# Altium PCB QY-PLC-20200726.PcbDoc (part 1 of 5)
Units mm, origin at the board's own origin, x right, y up, seen from the top; angles counter-clockwise.
Board outline 190.88 x 117.47 mm, 2 copper layers (Top Layer, Bottom Layer); 405 components, 307 nets, 1341 pads, 251 vias.
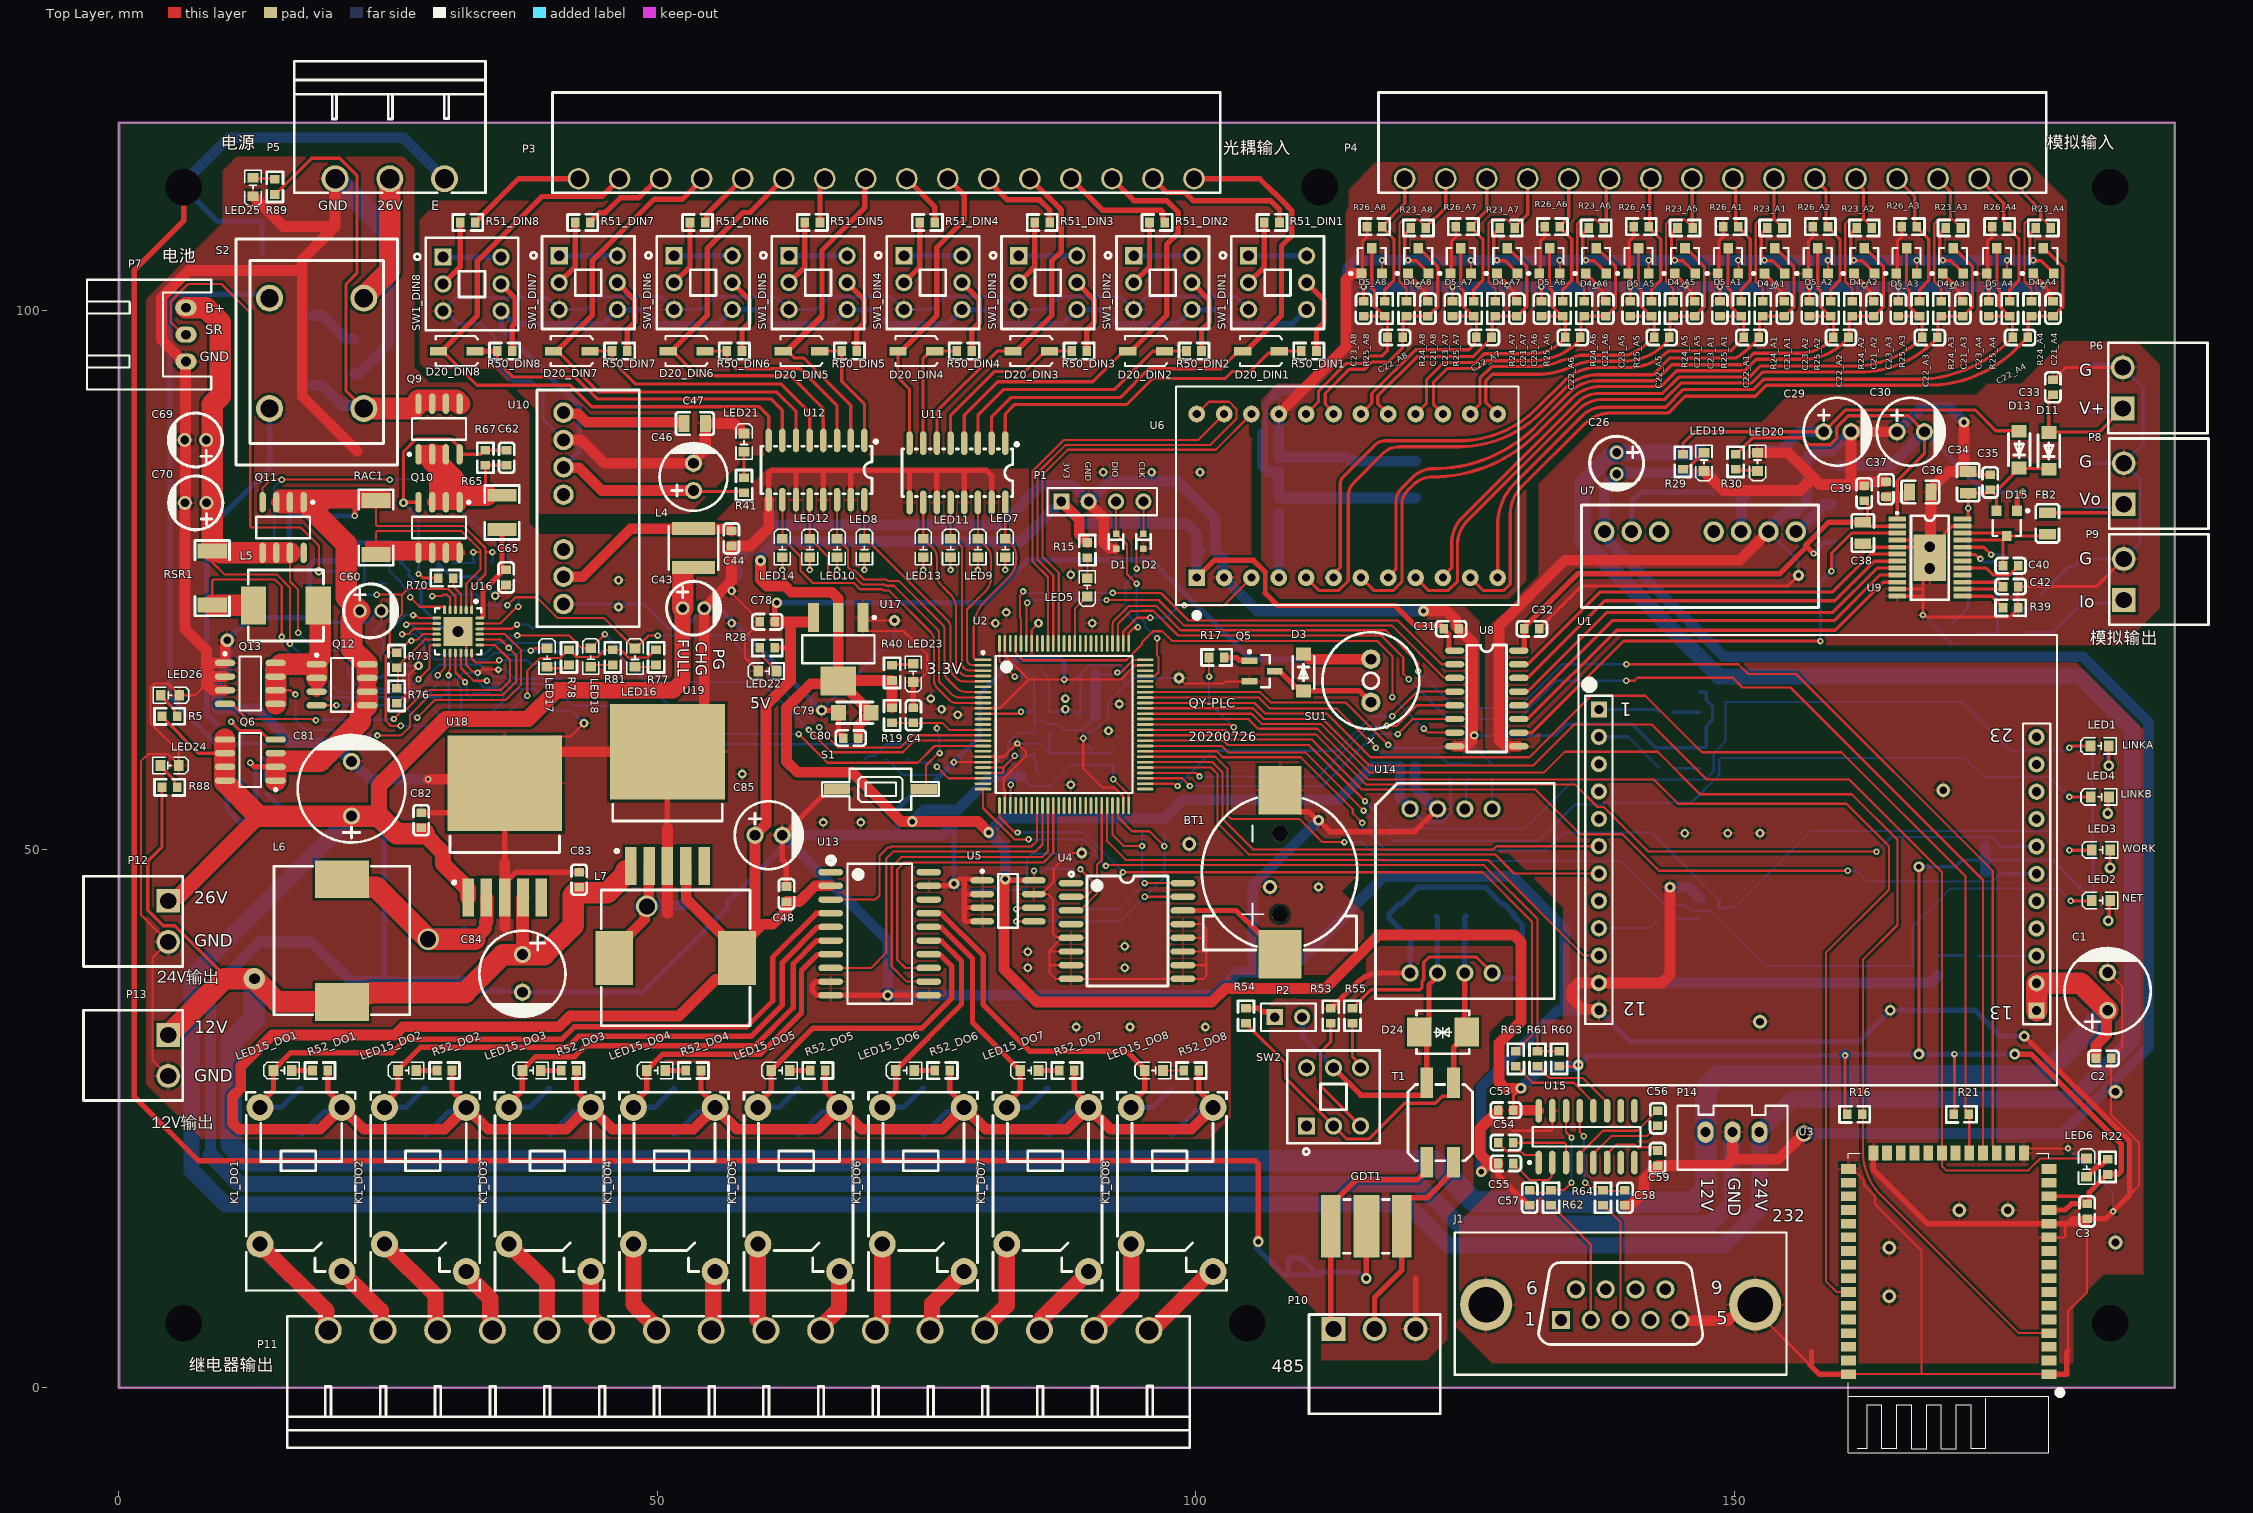
[diagram p0: Top Layer view]
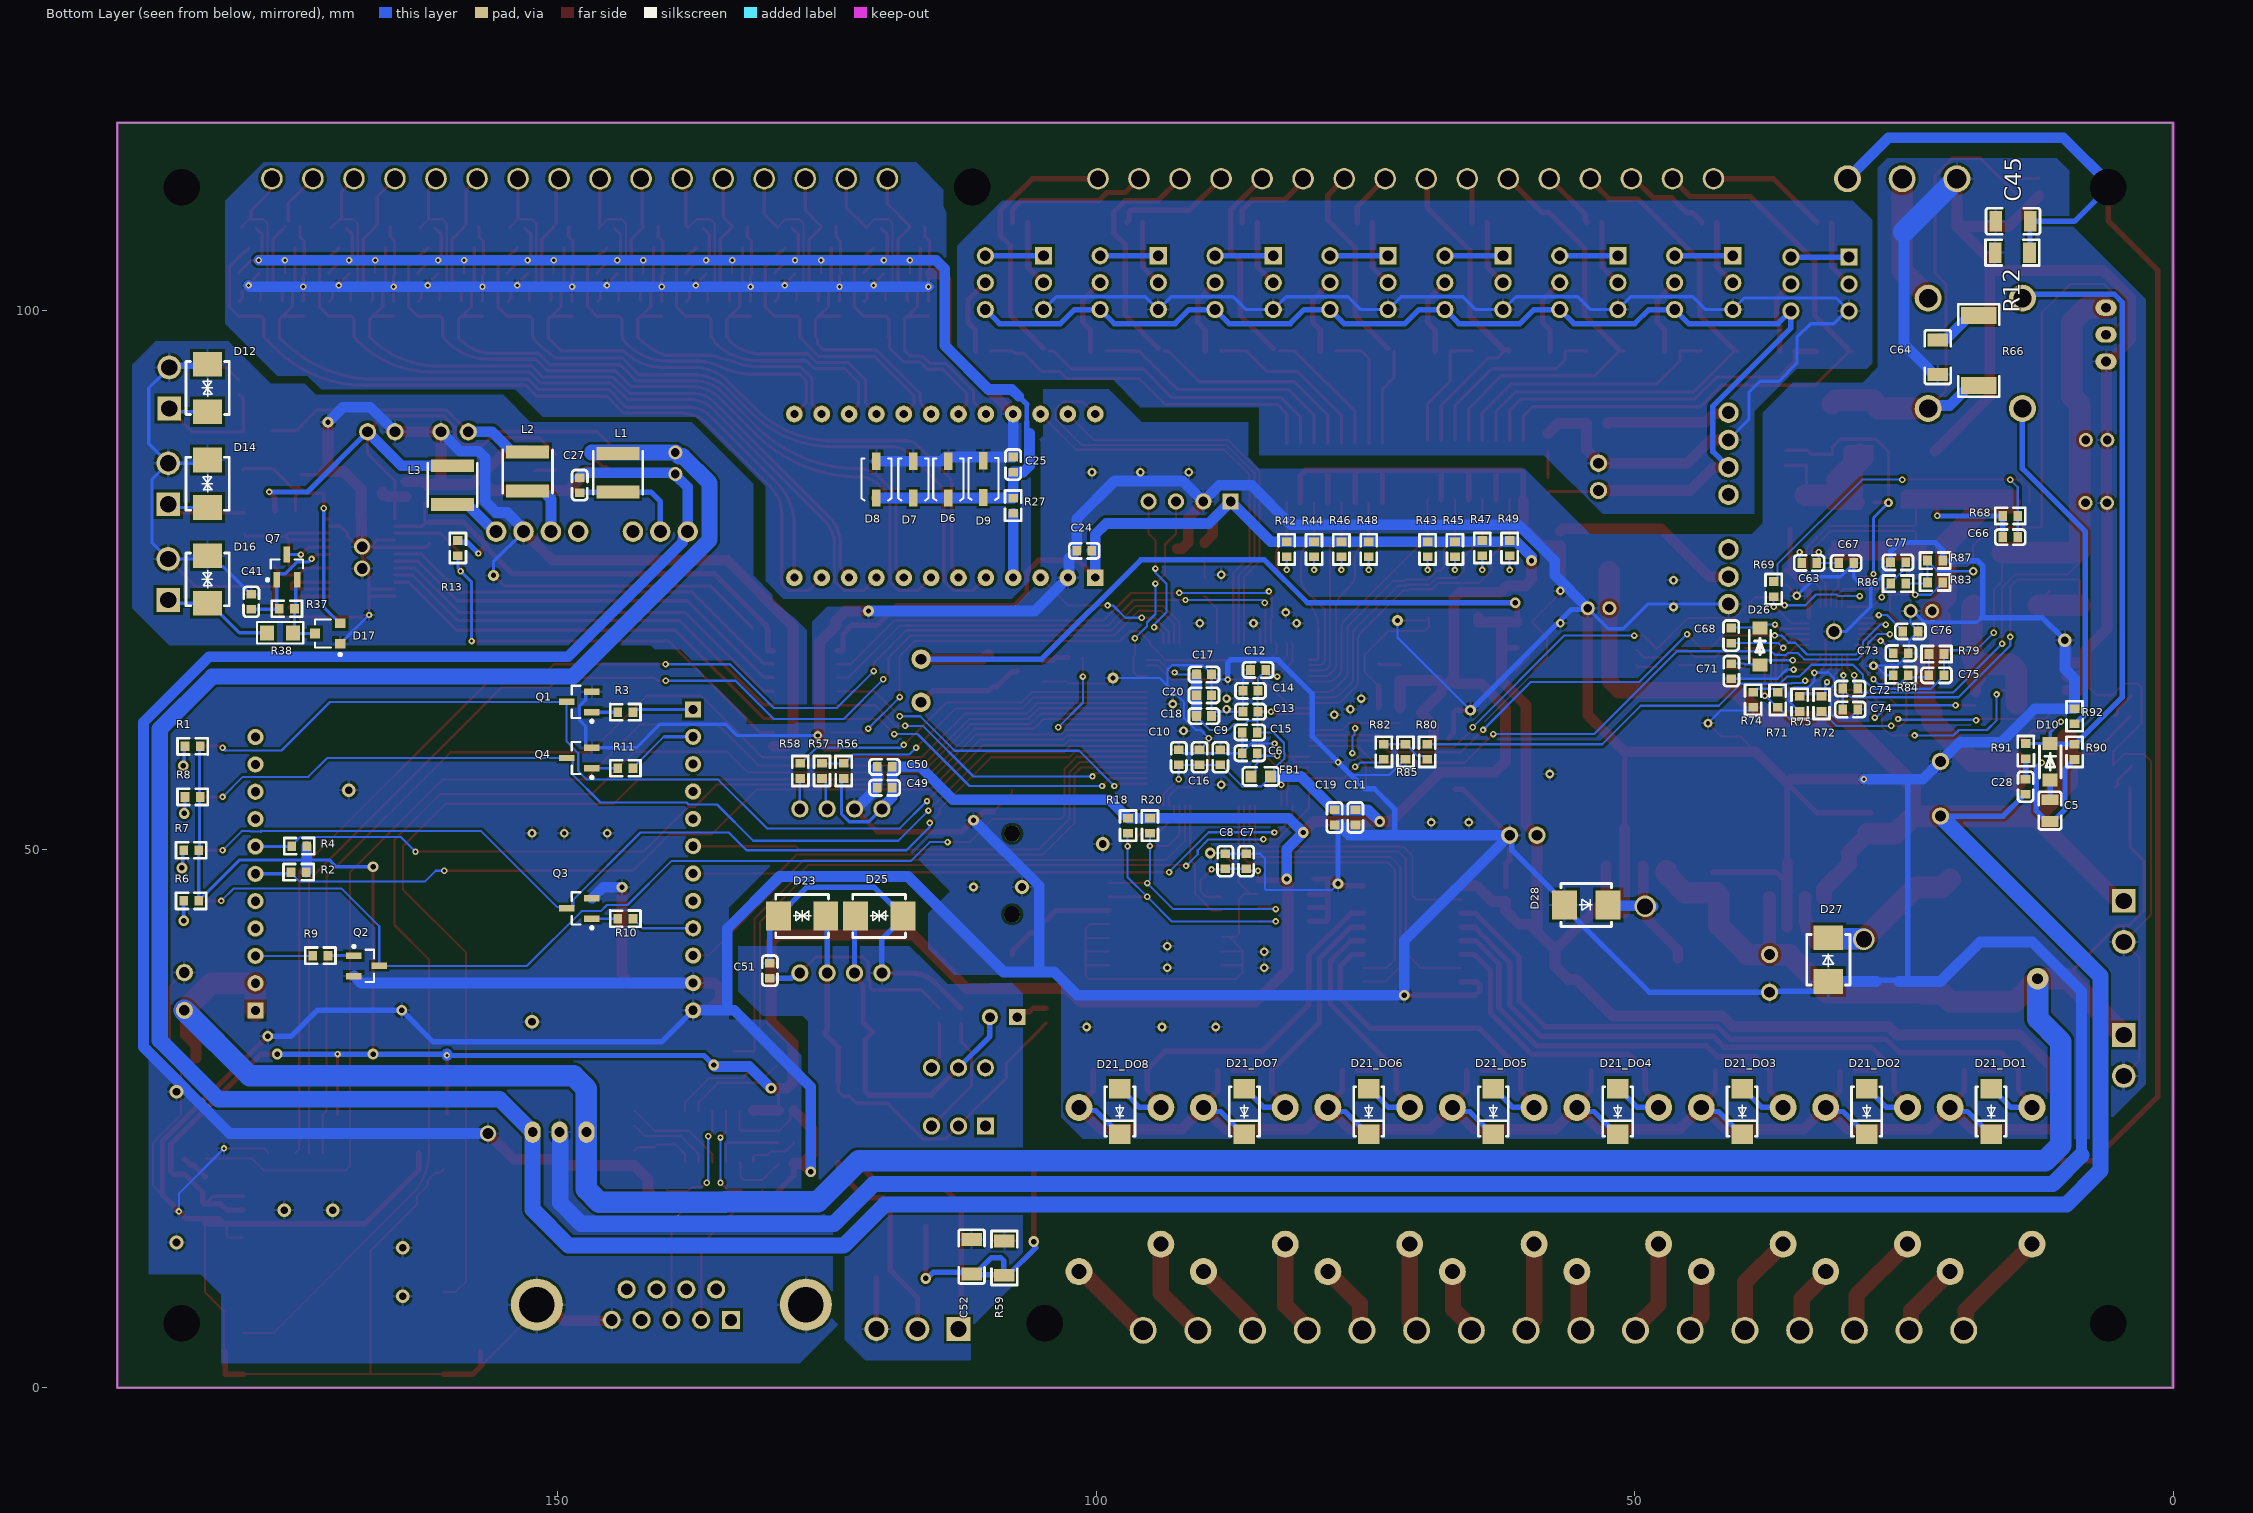
[diagram p1: Bottom Layer view, seen from below]

## Layer stack, top to bottom
Top Solder: solder mask 0.0102, Solder Resist, Dk 3.5
Top Layer: signal copper 0.0356
Dielectric 1: dielectric 0.32, FR-4, Dk 4.8
Bottom Layer: signal copper 0.0356
Bottom Solder: solder mask 0.0102, Solder Resist, Dk 3.5

## Board outline
0,0 0,117.475 190.881,117.475 190.881,0

## Design rules (kind name [scope] priority, off if disabled: settings)
Clearance Clearance_4 [InComponent('U16')] p1: gap=0.2 ignorepadtopadclearanceinfootprint=FALSE
Clearance Clearance_3 [InComponent('U16') vs IsPad] p2: gap=0.2 ignorepadtopadclearanceinfootprint=FALSE
Clearance Clearance_2 [InComponent('U9') vs IsPad] p3: gap=0.18 ignorepadtopadclearanceinfootprint=FALSE
Clearance Clearance_1 [InComponent('U2') or InComponent('U9') vs IsPad] p4: gap=0.2 ignorepadtopadclearanceinfootprint=FALSE
Clearance [All] p5: gap=0.254 ignorepadtopadclearanceinfootprint=FALSE except(0: Arc-Hole Track-Hole SMDPad-Hole THPad-Hole Via-Hole Fill-Hole Poly-Hole Region-Hole Text-Hole)
HoleSize [All] p1 off: absolutevalues=TRUE maxlimit=2.54 minlimit=0.025 maxpercent=80.000 minpercent=20.000
MinimumSolderMaskSliver [All] p1 off: minsoldermaskwidth=0.254
PolygonConnect [All] p1: connectstyle=Relief reliefconductorwidth=0.254 reliefentries=4 polygonreliefangle="90 Angle" airgapwidth=0.254
RoomDefinition U_adcIn [InComponentClass('U_adcIn')] p1 off: confinementstyle=ConfineIn formatcopy=TRUE lockcomponents=FALSE outline 131.826,70.88 131.826,93.486 96.774,93.486 96.774,70.88
RoomDefinition DO8 [InComponentClass('DO8')] p2 off: confinementstyle=ConfineIn formatcopy=TRUE lockcomponents=FALSE outline 103.632,8.382 103.632,30.734 92.202,30.734 92.202,8.382
RoomDefinition DO7 [InComponentClass('DO7')] p3 off: confinementstyle=ConfineIn formatcopy=TRUE lockcomponents=FALSE outline 92.075,8.382 92.075,30.734 80.645,30.734 80.645,8.382
RoomDefinition DO6 [InComponentClass('DO6')] p4 off: confinementstyle=ConfineIn formatcopy=TRUE lockcomponents=FALSE outline 80.518,8.382 80.518,30.734 69.088,30.734 69.088,8.382
RoomDefinition DO5 [InComponentClass('DO5')] p5 off: confinementstyle=ConfineIn formatcopy=TRUE lockcomponents=FALSE outline 68.961,8.382 68.961,30.734 57.531,30.734 57.531,8.382
RoomDefinition DO4 [InComponentClass('DO4')] p6 off: confinementstyle=ConfineIn formatcopy=TRUE lockcomponents=FALSE outline 57.404,8.382 57.404,30.734 45.974,30.734 45.974,8.382
RoomDefinition DO3 [InComponentClass('DO3')] p7 off: confinementstyle=ConfineIn formatcopy=TRUE lockcomponents=FALSE outline 45.847,8.382 45.847,30.734 34.417,30.734 34.417,8.382
RoomDefinition DO2 [InComponentClass('DO2')] p8 off: confinementstyle=ConfineIn formatcopy=TRUE lockcomponents=FALSE outline 34.29,8.382 34.29,30.734 22.86,30.734 22.86,8.382
RoomDefinition DO1 [InComponentClass('DO1')] p9 off: confinementstyle=ConfineIn formatcopy=TRUE lockcomponents=FALSE outline 22.733,8.382 22.733,30.734 11.303,30.734 11.303,8.382
RoomDefinition DIN8 [InComponentClass('DIN8')] p10 off: confinementstyle=ConfineIn formatcopy=TRUE lockcomponents=FALSE outline 38.227,95.123 38.227,109.22 27.575,109.22 27.575,95.123
RoomDefinition DIN7 [InComponentClass('DIN7')] p11 off: confinementstyle=ConfineIn formatcopy=TRUE lockcomponents=FALSE outline 48.895,95.123 48.895,109.093 38.243,109.093 38.243,95.123
RoomDefinition DIN6 [InComponentClass('DIN6')] p12 off: confinementstyle=ConfineIn formatcopy=TRUE lockcomponents=FALSE outline 59.563,95.123 59.563,109.093 48.911,109.093 48.911,95.123
RoomDefinition DIN5 [InComponentClass('DIN5')] p13 off: confinementstyle=ConfineIn formatcopy=TRUE lockcomponents=FALSE outline 70.231,95.123 70.231,109.093 59.579,109.093 59.579,95.123
RoomDefinition DIN4 [InComponentClass('DIN4')] p14 off: confinementstyle=ConfineIn formatcopy=TRUE lockcomponents=FALSE outline 80.899,95.123 80.899,109.093 70.247,109.093 70.247,95.123
RoomDefinition DIN3 [InComponentClass('DIN3')] p15 off: confinementstyle=ConfineIn formatcopy=TRUE lockcomponents=FALSE outline 91.567,95.123 91.567,109.093 80.915,109.093 80.915,95.123
RoomDefinition DIN2 [InComponentClass('DIN2')] p16 off: confinementstyle=ConfineIn formatcopy=TRUE lockcomponents=FALSE outline 102.235,95.123 102.235,109.093 91.583,109.093 91.583,95.123
RoomDefinition DIN1 [InComponentClass('DIN1')] p17 off: confinementstyle=ConfineIn formatcopy=TRUE lockcomponents=FALSE outline 112.903,95.123 112.903,109.093 102.251,109.093 102.251,95.123
RoutingVias [All] p1: holewidth=0.4 width=0.8 viastyle="Through Hole" minholewidth=0.3 minwidth=0.6 maxholewidth=5 maxwidth=5
SilkToSilkClearance [All] p1 off: silktosilkclearance=0.254
SilkToSolderMaskClearance [IsPad] p1 off: minsilkscreentomaskgap=0.254 clearancetoexposedcopper=TRUE
SolderMaskExpansion [All] p1: expansion=0.102 istentingtop=FALSE
Width [All] p1: maxlimit=5 minlimit=0.2 preferedwidth=0.254
26 further rules are at their usual default settings.

## Classes and differential pairs
component class U_power: C5 C28 C60 C62 C63 C64 C65 C66 C67 C68 C69 C70 C71 C72 C73 C74 C75 C76 C77 C78 C79 C80 C81 C82 C83 C84 C85 D10 D26 D27 D28 L5 L6 L7 LED16 LED17 LED18 LED22 LED23 LED24 LED25 LED26 Q6 Q9 Q10 Q11 Q12 Q13 R5 R28 R40 R65 R66 R67 R68 R69 R70 R71 R72 R73 R74 R75 R76 R77 R78 R79 R80 R81 R82 R83 R84 R85 R86 R87 R88 R89 R90 R91 R92 RAC1 RSR1 S2 U16 U17 U18 U19
component class TopView: C45 J1 P3 P4 P5 P6 P7 P8 P9 P10 P11 P12 P13 P14 R12
channel class subADCIn: A1 A2 A3 A4 A5 A6 A7 A8
component class A8: C21_A8 C22_A8 C23_A8 D4_A8 D5_A8 R23_A8 R24_A8 R25_A8 R26_A8
component class A7: C21_A7 C22_A7 C23_A7 D4_A7 D5_A7 R23_A7 R24_A7 R25_A7 R26_A7
component class A6: C21_A6 C22_A6 C23_A6 D4_A6 D5_A6 R23_A6 R24_A6 R25_A6 R26_A6
component class A5: C21_A5 C22_A5 C23_A5 D4_A5 D5_A5 R23_A5 R24_A5 R25_A5 R26_A5
component class A4: C21_A4 C22_A4 C23_A4 D4_A4 D5_A4 R23_A4 R24_A4 R25_A4 R26_A4
component class A3: C21_A3 C22_A3 C23_A3 D4_A3 D5_A3 R23_A3 R24_A3 R25_A3 R26_A3
component class A2: C21_A2 C22_A2 C23_A2 D4_A2 D5_A2 R23_A2 R24_A2 R25_A2 R26_A2
component class A1: C21_A1 C22_A1 C23_A1 D4_A1 D5_A1 R23_A1 R24_A1 R25_A1 R26_A1
component class U_relayOut: C48 U13
component class subDACOut: C33 C34 C35 C36 C37 C38 C39 C40 C41 C42 D11 D12 D13 D14 D15 D16 D17 FB2 Q7 R13 R37 R38 R39 U9
channel class subRelayOut: DO1 DO2 DO3 DO4 DO5 DO6 DO7 DO8
channel class subDIn: DIN1 DIN2 DIN3 DIN4 DIN5 DIN6 DIN7 DIN8
net class Relay_CTR[1..8]: Relay_CTR1 Relay_CTR2 Relay_CTR3 Relay_CTR4 Relay_CTR5 Relay_CTR6 Relay_CTR7 Relay_CTR8
net class OP_P[1..8]: OP_P1 OP_P2 OP_P3 OP_P4 OP_P5 OP_P6 OP_P7 OP_P8
net class OP_N[1..8]: DI_N1 DI_N2 DI_N3 DI_N4 DI_N5 DI_N6 DI_N7 DI_N8
net class DO_P[1..8]: DO_P1 DO_P2 DO_P3 DO_P4 DO_P5 DO_P6 DO_P7 DO_P8
net class DO_N[1..8]: DO_N1 DO_N2 DO_N3 DO_N4 DO_N5 DO_N6 DO_N7 DO_N8
net class DI_P[1..8]: DI_P1 DI_P2 DI_P3 DI_P4 DI_P5 DI_P6 DI_P7 DI_P8
net class DI_N[1..8]: DI_N1 DI_N2 DI_N3 DI_N4 DI_N5 DI_N6 DI_N7 DI_N8
net class CH_L_C[1..8]: CH_L_C1 CH_L_C2 CH_L_C3 CH_L_C4 CH_L_C5 CH_L_C6 CH_L_C7 CH_L_C8
net class CH_L[1..8]: CH_L1 CH_L2 CH_L3 CH_L4 CH_L5 CH_L6 CH_L7 CH_L8
net class CH_H_C[1..8]: CH_H_C1 CH_H_C2 CH_H_C3 CH_H_C4 CH_H_C5 CH_H_C6 CH_H_C7 CH_H_C8
net class CH_H[1..8]: CH_H1 CH_H2 CH_H3 CH_H4 CH_H5 CH_H6 CH_H7 CH_H8
component class U_mcu: BT1 C1 C2 C3 C4 C6 C7 C8 C9 C10 C11 C12 C13 C14 C15 C16 C17 C18 C19 C20 D1 D2 D3 FB1 LED1 LED2 LED3 LED4 LED5 LED6 P1 Q1 Q2 Q3 Q4 Q5 R1 R2 R3 R4 R6 R7 R8 R9 R10 R11 R15 R16 R17 R18 R19 R20 R21 R22 S1 SU1 U1 U2 U3 U4 U5
component class U_link: C49 C50 C51 C52 C53 C54 C55 C56 C57 C58 C59 D23 D24 D25 GDT1 P2 R53 R54 R55 R56 R57 R58 R59 R60 R61 R62 R63 R64 SW2 T1 U14 U15
component class U_dIn: C43 C44 C46 C47 L4 LED7 LED8 LED9 LED10 LED11 LED12 LED13 LED14 LED21 R41 R42 R43 R44 R45 R46 R47 R48 R49 U10 U11 U12
component class U_dacOut: C26 C27 C29 C30 C31 C32 L1 L2 L3 LED19 LED20 R29 R30 U7 U8
component class U_adcIn: C24 C25 D6 D7 D8 D9 R27 U6
component class DO8: D21_DO8 K1_DO8 LED15_DO8 R52_DO8
component class DO7: D21_DO7 K1_DO7 LED15_DO7 R52_DO7
component class DO6: D21_DO6 K1_DO6 LED15_DO6 R52_DO6
component class DO5: D21_DO5 K1_DO5 LED15_DO5 R52_DO5
component class DO4: D21_DO4 K1_DO4 LED15_DO4 R52_DO4
component class DO3: D21_DO3 K1_DO3 LED15_DO3 R52_DO3
component class DO2: D21_DO2 K1_DO2 LED15_DO2 R52_DO2
component class DO1: D21_DO1 K1_DO1 LED15_DO1 R52_DO1
component class DIN8: D20_DIN8 R50_DIN8 R51_DIN8 SW1_DIN8
component class DIN7: D20_DIN7 R50_DIN7 R51_DIN7 SW1_DIN7
component class DIN6: D20_DIN6 R50_DIN6 R51_DIN6 SW1_DIN6
component class DIN5: D20_DIN5 R50_DIN5 R51_DIN5 SW1_DIN5
component class DIN4: D20_DIN4 R50_DIN4 R51_DIN4 SW1_DIN4
component class DIN3: D20_DIN3 R50_DIN3 R51_DIN3 SW1_DIN3
component class DIN2: D20_DIN2 R50_DIN2 R51_DIN2 SW1_DIN2
component class DIN1: D20_DIN1 R50_DIN1 R51_DIN1 SW1_DIN1

## Components (designator, comment, footprint, x,y, rotation, side; value= is the part's Value field where it differs from the comment)
BT1 "CR1220-2" BAT-SMD_CR1220-2 107.796,47.879 r90 top
C1 "220uF,25V" CAP-TH_BD8.0-P3.50-D1.0-FD 184.658,36.802 r90 top value=KF221M025F115A
C2 "0.1uF,25V" C0603 184.277,30.607 r180 top value="104, 16V"
C3 "0.1uF,10V" C0603 182.753,16.383 r90 top value="104, 16V"
C4 "0.1uF,10V" C0603 73.754,62.445 r270 top value="104, 16V"
C5 "2.2uF,50V" C0805 11.43,53.594 r270 bottom value="0.1uF, 50V, 10%, X7R"
C6 "0.1uF,10V" C0603 85.725,58.928 r0 bottom
C7 "0.1uF,10V" C0603 86.059,48.895 r90 bottom value="104, 16V"
C8 "0.1uF,10V" C0603 88.011,48.895 r270 bottom value="104, 16V"
C9 "10uF,10V" C0603 88.462,58.547 r270 bottom value="104, 16V"
C10 "0.1uF,10V" C0603 92.329,58.547 r270 bottom value="104, 16V"
C11 "10uF,10V" C0603 75.917,52.959 r90 bottom value="104, 16V"
C12 "0.1uF,10V" C0603 84.959,66.645 r180 bottom value="104, 16V"
C13 "10uF,10V" C0603 85.66,62.778 r180 bottom value="104, 16V"
C14 "0.1uF,10V" C0603 85.66,64.711 r180 bottom value="104, 16V"
C15 "10uF,10V" C0603 85.725,60.844 r180 bottom value="104, 16V"
C16 "0.1uF,10V" C0603 90.395,58.547 r270 bottom value="104, 16V"
C17 "10uF,10V" C0603 89.978,66.245 r0 bottom value="104, 16V"
C18 "0.1uF,10V" C0603 89.978,62.377 r0 bottom value="104, 16V"
C19 "10uF,10V" C0603 77.851,52.959 r90 bottom value="104, 16V"
C20 "0.1uF,10V" C0603 89.978,64.311 r0 bottom value="104, 16V"
C21_A1 "0.1uF,25V" C0603 154.624,100.203 r270 top (schematic designator C21)
C21_A2 "0.1uF,25V" C0603 162.941,100.203 r270 top (schematic designator C21)
C21_A3 "0.1uF,25V" C0603 171.196,100.203 r270 top (schematic designator C21)
C21_A4 "0.1uF,25V" C0603 179.578,100.203 r270 top (schematic designator C21)
C21_A5 "0.1uF,25V" C0603 146.304,100.203 r270 top (schematic designator C21)
C21_A6 "0.1uF,25V" C0603 138.049,100.203 r270 top (schematic designator C21)
C21_A7 "0.1uF,25V" C0603 129.794,100.203 r270 top (schematic designator C21)
C21_A8 "0.1uF,25V" C0603 121.539,100.203 r270 top (schematic designator C21)
C22_A1 "1uF,25V" C0603 151.576,97.536 r180 top (schematic designator C22)
C22_A2 "1uF,25V" C0603 159.893,97.536 r180 top (schematic designator C22)
C22_A3 "1uF,25V" C0603 168.148,97.536 r180 top (schematic designator C22)
C22_A4 "1uF,25V" C0603 176.53,97.536 r180 top (schematic designator C22)
C22_A5 "1uF,25V" C0603 143.256,97.536 r180 top (schematic designator C22)
C22_A6 "1uF,25V" C0603 135.001,97.536 r180 top (schematic designator C22)
C22_A7 "1uF,25V" C0603 126.746,97.536 r180 top (schematic designator C22)
C22_A8 "1uF,25V" C0603 118.491,97.536 r180 top (schematic designator C22)
C23_A1 "0.1uF,25V" C0603 148.655,100.203 r90 top (schematic designator C23)
C23_A2 "0.1uF,25V" C0603 156.972,100.203 r90 top (schematic designator C23)
C23_A3 "0.1uF,25V" C0603 165.227,100.203 r90 top (schematic designator C23)
C23_A4 "0.1uF,25V" C0603 173.609,100.203 r90 top (schematic designator C23)
C23_A5 "0.1uF,25V" C0603 140.335,100.203 r90 top (schematic designator C23)
C23_A6 "0.1uF,25V" C0603 132.08,100.203 r90 top (schematic designator C23)
C23_A7 "0.1uF,25V" C0603 123.825,100.203 r90 top (schematic designator C23)
C23_A8 "0.1uF,25V" C0603 115.57,100.203 r90 top (schematic designator C23)
C24 "10uF,10V" C0603 101.092,77.724 r0 bottom
C25 "10uF,10V" C0603 107.696,85.725 r90 bottom
C26 "10uF,50V" CAP-TH_BD5.0-P2.00-D0.8-FD 139.065,85.852 r270 top value=100UF
C27 "1uF,50V" C0603 147.955,83.82 r270 bottom value="104, 16V"
C28 "0.1uF,50V" C0603 13.7,55.815 r270 bottom value="0.1uF, 50V, 10%, X7R"
C29 "100uF,50V" CAP-TH_BD6.3-P2.50-D1.0-FD 159.563,88.773 r0 top value=100UF
C30 "100uF,50V" CAP-TH_BD6.3-P2.50-D1.0-FD 166.37,88.773 r0 top value=100UF
C31 "0.1uF,16V" C0603 123.698,70.485 r180 top value="104, 16V"
C32 "0.1uF,16V" C0603 131.191,70.485 r180 top value="104, 16V"
C33 "0.1uF,50V" C0603 179.578,92.902 r90 top
C34 "4.7uF,50V" C0805 171.704,84.074 r90 top
C35 "0.1uF,50V" C0603 173.754,84.074 r90 top
C36 "10uF,50V" C0805 167.259,83.185 r0 top
C37 "0.1uF,50V" C0603 164.084,83.439 r90 top
C38 "10uF,50V" C0805 161.925,79.375 r270 top
C39 "0.1uF,50V" C0603 162.052,83.058 r90 top
C40 "4nF,50V" C0603 175.641,76.327 r0 top
C41 "22nF,50V" C0603 178.435,72.984 r90 bottom
C42 "1nF,50V" C0603 175.641,74.393 r0 top
C43 "10uF,50V" CAP-TH_BD5.0-P2.00-D0.8-FD 53.34,72.39 r0 top value=100UF
C44 "1uF,50V" C0603 56.87,78.867 r90 top value="104, 16V"
C45 "1nF,2kV" C1206 14.859,108.318 r0 bottom value="104, 16V"
C46 "100uF,50V" CAP-TH_BD6.3-P2.50-D1.0-FD 53.34,84.582 r90 top value=100UF
C47 "10uF,25V" C0805 53.467,89.535 r180 top value="104, 16V"
C48 "0.1uF,16V" C0603 61.976,45.847 r270 top
C49 "10uF,10V" C0603 119.634,55.724 r0 bottom value="104, 16V"
C50 "0.1uF,10V" C0603 119.634,57.658 r0 bottom value="104, 16V"
C51 "0.1uF,10V" C0603 130.302,38.733 r270 bottom value="104, 16V"
C52 "1nF,2kV" C1206 111.557,12.177 r90 bottom value="104, 16V"
C53 "0.1uF,50V" C0603 128.778,25.781 r0 top value="104, 16V"
C54 "0.1uF,50V" C0603 128.778,22.762 r0 top value="104, 16V"
C55 "0.1uF,50V" C0603 128.778,20.828 r0 top value="104, 16V"
C56 "0.1uF,50V" C0603 142.875,25.019 r270 top value="104, 16V"
C57 "1nF,50V" C0603 130.989,17.653 r270 top value="104, 16V"
C58 "1nF,50V" C0603 139.827,17.653 r270 top value="104, 16V"
C59 "0.1uF,50V" C0603 142.875,21.336 r90 top value="104, 16V"
C60 "10uF,50V" CAP-TH_BD5.0-P2.00-D0.8-FD 23.368,72.136 r0 top value=ERM1HM100D11OT
C62 "0.1uF,50V" C0603 35.988,86.36 r270 top value="0.1uF, 50V, 10%, X7R"
C63 "0.1uF,50V" C0603 33.782,76.581 r180 bottom value=0.1uF
C64 "2.2uF,50V" C1206 21.844,95.707 r90 bottom value="2.2uF, 35V, 10%, X7R"
C65 "1uF,50V" C0603 35.941,75.249 r270 top value="1uF, 50V, 10%, X7R"
C66 "0.1uF,50V" C0603 15.113,78.994 r0 bottom value="0.1uF, 50V, 10%, X7R"
C67 "0.1uF,50V" C0603 30.353,76.581 r180 bottom value="0.1uF, 50V, 10%, X7R"
C68 "0.1uF,50V" C0603 41.021,69.85 r90 bottom value="0.1uF, 50V, 10%, X7R"
C69 "10uF,50V" CAP-TH_BD5.0-P2.00-D0.8-FD 7.096,88.011 r180 top value=ERM1HM100D11OT
C70 "10uF,50V" CAP-TH_BD5.0-P2.00-D0.8-FD 7.128,82.169 r180 top value=ERM1HM100D11OT
C71 "1uF,50V" C0603 41.021,66.545 r270 bottom value="1uF, 16V, 10%, X7R"
C72 "0.1uF,50V" C0603 29.972,64.926 r0 bottom value="0.1uF, 16V, 10%, X7R"
C73 "1uF,50V" C0603 25.273,68.199 r180 bottom value="1uF, 16V, 10%, X7R"
C74 "0.1uF,50V" C0603 29.972,62.992 r0 bottom value="0.1uF, 50V, 10%, X7R"
C75 "22pF,50V" C0603 21.971,66.167 r0 bottom value="22pF, 25V, 10%, X7R"
C76 "0.027uF,50V" C0603 24.384,70.231 r180 bottom value="0.027uF, 16V, 5%, X7R"
C77 "0.1uF,50V" C0603 25.533,76.656 r0 bottom value="0.1uF, 16V, 10%, X7R"
C78 "0.1uF,16V" C0603 60.198,71.12 r0 top value=104,16V
C79 "22uF,10V" CAP-SMD_L3.2-W1.6-R-RD 68.316,62.682 r0 top value=TAJA226K010RNJ
C80 "0.1uF,16V" C0603 67.945,60.325 r0 top value="104, 50V"
C81 "470uF,50V" CAP-TH_BD10.0-P5.00-D1.0-FD 21.59,55.626 r90 top value=LKME1401V471MF
C82 "1uF,50V" C0603 28.067,52.705 r90 top
C83 "1uF,25V" C0603 42.729,47.182 r90 top
C84 "180uF,35V" CAP-TH_BD8.0-P3.50-D1.0-FD 37.459,38.481 r270 top value=LKMD1401H181MF
C85 "330uF,16V" CAP-TH_BD6.3-P2.50-D1.0-FD 60.325,51.308 r0 top value=LKMC0901C181MF
D1 "ESD5Z3V3 3.3V" SOD-523 92.583,78.613 r90 top
D2 "ESD5Z3V3 3.3V" SOD-523 95.123,78.613 r90 top
D3 "1N4148W" SOD-123_L2.8-W1.8-LS3.7-RD 109.982,66.421 r270 top
D4_A1 "BAV199" SOT-23 153.735,104.648 r0 top (schematic designator D4)
D4_A2 "BAV199" SOT-23 162.052,104.648 r0 top (schematic designator D4)
D4_A3 "BAV199" SOT-23 170.307,104.648 r0 top (schematic designator D4)
D4_A4 "BAV199" SOT-23 178.689,104.648 r0 top (schematic designator D4)
D4_A5 "BAV199" SOT-23 145.415,104.648 r0 top (schematic designator D4)
D4_A6 "BAV199" SOT-23 137.16,104.648 r0 top (schematic designator D4)
D4_A7 "BAV199" SOT-23 128.905,104.648 r0 top (schematic designator D4)
D4_A8 "BAV199" SOT-23 120.65,104.648 r0 top (schematic designator D4)
D5_A1 "BAV199" SOT-23 149.417,104.648 r0 top (schematic designator D5)
D5_A2 "BAV199" SOT-23 157.734,104.648 r0 top (schematic designator D5)
D5_A3 "BAV199" SOT-23 165.989,104.648 r0 top (schematic designator D5)
D5_A4 "BAV199" SOT-23 174.371,104.648 r0 top (schematic designator D5)
D5_A5 "BAV199" SOT-23 141.097,104.648 r0 top (schematic designator D5)
D5_A6 "BAV199" SOT-23 132.842,104.648 r0 top (schematic designator D5)
D5_A7 "BAV199" SOT-23 124.587,104.648 r0 top (schematic designator D5)
D5_A8 "BAV199" SOT-23 116.332,104.648 r0 top (schematic designator D5)
D6 "BZT52C5V6" SOD-123 113.713,84.328 r270 bottom
D7 "BZT52C5V6" SOD-123 116.967,84.328 r270 bottom
D8 "BZT52C5V6" SOD-123 120.396,84.328 r270 bottom
D9 "BZT52C5V6" SOD-123 110.458,84.377 r270 bottom
D10 "1N5819HW-7-F" SOD-123_L2.8-W1.8-LS3.7-FD 11.407,58.127 r90 bottom
D11 "1N5819HW-7-F" SOD-123_L2.8-W1.8-LS3.7-FD 179.197,86.995 r270 top
D12 "SMBJ33CA" SMB_L4.6-W3.6-LS5.3-BI 182.499,92.837 r270 bottom
D13 "1N5819HW-7-F" SOD-123_L2.8-W1.8-LS3.7-FD 176.443,87.122 r270 top
D14 "SMBJ20CA" SMB_L4.6-W3.6-LS5.3-BI 182.499,83.947 r270 bottom
D15 "BAV199" SOT-23 175.282,80.264 r180 top
D16 "SMBJ20CA" SMB_L4.6-W3.6-LS5.3-BI 182.499,75.057 r270 bottom
D17 "BAV199" SOT-23 171.355,70.038 r90 bottom
D20_DIN1 "BZT52C6V8" SOD-123 106.045,96.266 r0 top (schematic designator D20)
D20_DIN2 "BZT52C6V8" SOD-123 95.377,96.266 r0 top (schematic designator D20)
D20_DIN3 "BZT52C6V8" SOD-123 84.709,96.266 r0 top (schematic designator D20)
D20_DIN4 "BZT52C6V8" SOD-123 74.041,96.266 r0 top (schematic designator D20)
D20_DIN5 "BZT52C6V8" SOD-123 63.373,96.266 r0 top (schematic designator D20)
D20_DIN6 "BZT52C6V8" SOD-123 52.705,96.266 r0 top (schematic designator D20)
D20_DIN7 "BZT52C6V8" SOD-123 42.037,96.266 r0 top (schematic designator D20)
D20_DIN8 "BZT52C6V8" SOD-123 31.369,96.266 r0 top (schematic designator D20)
D21_DO1 "SS14" SMA_L4.4-W2.8-LS5.4-RD 16.891,25.654 r90 bottom (schematic designator D21)
D21_DO2 "SS14" SMA_L4.4-W2.8-LS5.4-RD 28.448,25.654 r90 bottom (schematic designator D21)
D21_DO3 "SS14" SMA_L4.4-W2.8-LS5.4-RD 40.005,25.654 r90 bottom (schematic designator D21)
D21_DO4 "SS14" SMA_L4.4-W2.8-LS5.4-RD 51.562,25.654 r90 bottom (schematic designator D21)
D21_DO5 "SS14" SMA_L4.4-W2.8-LS5.4-RD 63.119,25.654 r90 bottom (schematic designator D21)
D21_DO6 "SS14" SMA_L4.4-W2.8-LS5.4-RD 74.676,25.654 r90 bottom (schematic designator D21)
D21_DO7 "SS14" SMA_L4.4-W2.8-LS5.4-RD 86.233,25.654 r90 bottom (schematic designator D21)
D21_DO8 "SS14" SMA_L4.4-W2.8-LS5.4-RD 97.79,25.654 r90 bottom (schematic designator D21)
D23 "SMBJ6.5CA" SMB_L4.6-W3.6-LS5.3-BI 127.295,43.815 r0 bottom
D24 "SMBJ12CA" SMB_L4.6-W3.6-LS5.3-BI 122.936,33.02 r0 top
D25 "SMBJ6.5CA" SMB_L4.6-W3.6-LS5.3-BI 120.138,43.815 r0 bottom
D26 "1N5819HW-7-F" SOD-123_L2.8-W1.8-LS3.7-FD 38.354,68.834 r90 bottom
D27 "1N5822" SMB_L4.6-W3.6-LS5.3-RD 32.004,39.751 r270 bottom
D28 "1N5822" SMB_L4.6-W3.6-LS5.3-RD 54.483,44.831 r0 bottom
FB1 "600R@100MHZ" L0603 84.709,56.769 r0 bottom value=BLM18BD601SN1D
FB2 "600R@100MHZ" L0805 179.07,80.264 r90 top value="3.3K, 10%"
GDT1 "3RL090M-5-S" DIO-DT-SMD_L7.2-W5.0 115.824,14.986 r180 top
J1 "DS1034-09FUNSi44" DSUB-TH_2-5747706-0 139.434,7.724 r180 top
K1_DO1 "JZC-32F/005-HS3(555)" RELAY-TH_JZC-32F-XXXHXX 16.891,18.415 r270 top (schematic designator K1)
K1_DO2 "JZC-32F/005-HS3(555)" RELAY-TH_JZC-32F-XXXHXX 28.448,18.415 r270 top (schematic designator K1)
K1_DO3 "JZC-32F/005-HS3(555)" RELAY-TH_JZC-32F-XXXHXX 40.005,18.415 r270 top (schematic designator K1)
K1_DO4 "JZC-32F/005-HS3(555)" RELAY-TH_JZC-32F-XXXHXX 51.562,18.415 r270 top (schematic designator K1)
K1_DO5 "JZC-32F/005-HS3(555)" RELAY-TH_JZC-32F-XXXHXX 63.119,18.415 r270 top (schematic designator K1)
K1_DO6 "JZC-32F/005-HS3(555)" RELAY-TH_JZC-32F-XXXHXX 74.676,18.415 r270 top (schematic designator K1)
K1_DO7 "JZC-32F/005-HS3(555)" RELAY-TH_JZC-32F-XXXHXX 86.233,18.415 r270 top (schematic designator K1)
K1_DO8 "JZC-32F/005-HS3(555)" RELAY-TH_JZC-32F-XXXHXX 97.79,18.415 r270 top (schematic designator K1)
L1 "SLS3D16S6R8NTT" IND-SMD_L4.0-W4.0_SLS3DXX 144.399,84.963 r270 bottom value=6.8uH
L2 "SLS3D16S6R8NTT" IND-SMD_L4.0-W4.0_SLS3DXX 152.781,85.09 r270 bottom value=6.8uH
L3 "SLS3D16S6R8NTT" IND-SMD_L4.0-W4.0_SLS3DXX 159.766,83.82 r270 bottom value=6.8uH
L4 "SLS3D16S6R8NTT" IND-SMD_L4.0-W4.0_SLS3DXX 53.34,77.978 r90 top value=6.8uH
L5 "6.8uH" IND-SMD_L7.3-W6.8 15.494,72.644 r180 top value=RLF7030T-6R8M2R8
L6 "68uH" IND-SMD_L13.7-W12.6_MS1360 20.701,41.529 r270 top value=MS1360-680M
L7 "47uH" IND-SMD_L13.7-W12.6_MS1360 51.689,39.922 r0 top value=MS1360-470M
LED1 "NCD0603R1" LED0603-RD 183.908,59.599 r0 top
LED2 "NCD0603R1" LED0603-RD 184.035,45.249 r0 top
LED3 "NCD0603R1" LED0603-RD 184.035,49.947 r0 top
LED4 "NCD0603R1" LED0603-RD 183.935,54.864 r0 top
LED5 "NCD0603R1" LED0603-RD 89.916,74.334 r90 top
LED6 "NCD0603R1" LED0603-RD 182.702,20.447 r270 top
LED7 "NCD0603R1" LED0603-RD 82.296,77.978 r270 top
LED8 "NCD0603R1" LED0603-RD 69.215,77.978 r270 top
LED9 "NCD0603R1" LED0603-RD 79.756,77.978 r270 top
LED10 "NCD0603R1" LED0603-RD 66.675,77.978 r270 top
LED11 "NCD0603R1" LED0603-RD 77.216,77.978 r270 top
LED12 "NCD0603R1" LED0603-RD 64.135,77.978 r270 top
LED13 "NCD0603R1" LED0603-RD 74.676,77.978 r270 top
LED14 "NCD0603R1" LED0603-RD 61.595,77.978 r270 top
LED15_DO1 "NCD0603R1" LED0603-RD 15.197,29.464 r0 top (schematic designator LED15)
LED15_DO2 "NCD0603R1" LED0603-RD 26.754,29.464 r0 top (schematic designator LED15)
LED15_DO3 "NCD0603R1" LED0603-RD 38.311,29.464 r0 top (schematic designator LED15)
LED15_DO4 "NCD0603R1" LED0603-RD 49.868,29.464 r0 top (schematic designator LED15)
LED15_DO5 "NCD0603R1" LED0603-RD 61.425,29.464 r0 top (schematic designator LED15)
LED15_DO6 "NCD0603R1" LED0603-RD 72.982,29.464 r0 top (schematic designator LED15)
LED15_DO7 "NCD0603R1" LED0603-RD 84.539,29.464 r0 top (schematic designator LED15)
LED15_DO8 "NCD0603R1" LED0603-RD 96.096,29.464 r0 top (schematic designator LED15)
LED16 "NCD0603R1" LED0603-RD 47.916,67.796 r270 top
LED17 "NCD0603R1" LED0603-RD 39.751,67.818 r270 top
LED18 "NCD0603R1" LED0603-RD 43.815,67.818 r270 top
LED19 "NCD0603R1" LED0603-RD 147.174,85.979 r90 top
LED20 "NCD0603R1" LED0603-RD 152.146,85.979 r90 top
LED21 "NCD0603R1" LED0603-RD 58.039,87.757 r270 top
LED22 "NCD0603R1" LED0603-RD 60.198,66.548 r0 top
LED23 "NCD0603R1" LED0603-RD 73.749,66.382 r90 top
LED24 "NCD0603R1" LED0603-RD 4.699,57.785 r180 top
LED25 "NCD0603R1" LED0603-RD 12.446,111.506 r90 top
LED26 "NCD0603R1" LED0603-RD 4.738,64.313 r180 top
P1 "排针-4P" HDR1X4 87.503,82.296 r0 top
P2 "排针2.54mm 2P" HDR1X2 107.315,34.417 r0 top
P3 "WJ15EDGRC-3.81-16P" CONN-TH_16P-P3.81_WJ15EDGRC-3.81-16P 71.247,112.268 r180 top
P4 "WJ15EDGRC-3.81-16P" CONN-TH_16P-P3.81_WJ15EDGRC-3.81-16P 147.955,112.268 r180 top
P5 "KF2EDGRC-5.08-3P" CONN-TH_3P-P5.08_KF2EDGRC-5.08-3P 25.146,112.268 r180 top
P6 "WJ15EDGRC-3.81-2P" CONN-TH_2P-P3.81_WJ15EDGRC-3.81-2P 186.055,92.837 r90 top
P7 "XH2.54-3P" XH2.54-3P;弯角; 6.223,97.79 r270 top
P8 "WJ15EDGRC-3.81-2P" CONN-TH_2P-P3.81_WJ15EDGRC-3.81-2P 186.155,83.947 r90 top
P9 "WJ15EDGRC-3.81-2P" CONN-TH_2P-P3.81_WJ15EDGRC-3.81-2P 186.155,75.056 r90 top
P10 "WJ15EDGRC-3.81-3P" CONN-TH_3P-P3.81_WJ15EDGRC-3.81-3P 116.586,5.461 r0 top
P11 "KF2EDGRC-5.08-16P" CONN-TH_16P-P5.08_KF2EDGRC-5.08-16P 57.531,5.334 r0 top
P12 "WJ15EDGRC-3.81-2P" CONN-TH_2P-P3.81_WJ15EDGRC-3.81-2P 4.572,43.307 r270 top
P13 "WJ15EDGRC-3.81-2P" CONN-TH_2P-P3.81_WJ15EDGRC-3.81-2P 4.572,30.861 r270 top
P14 "XH2.54-3P" XH2.54-3P-直角 149.82,23.749 r0 top
Q1 "S8050" SOT-23_NPN 147.987,63.688 r0 bottom
Q2 "S8050" SOT-23_NPN 167.735,39.182 r180 bottom
Q3 "S8050" SOT-23_NPN 147.987,44.511 r0 bottom
Q4 "S8050" SOT-23_NPN 147.987,58.481 r0 bottom
Q5 "S8050" SOT-23_NPN 106.151,66.548 r0 top
Q6 "TDM3407" SO8_L 12.192,58.293 r180 top
Q7 "MMBTA05" SOT-23_NPN 175.133,76.2 r90 bottom
Q9 "TDM3407" SO8_L 29.718,89.027 r90 top
Q10 "TDM3407" SO8_L 29.718,79.883 r270 top
Q11 "TDM3407" SO8_L 15.24,79.883 r270 top
Q12 "FDS8447" SO8_L 20.701,65.278 r0 top
Q13 "FDS8447" SO8_L 12.192,65.405 r0 top
R1 "5.1K,1%" R0603 183.896,59.563 r180 bottom value="5.1K, 1%"
R2 "5.1K,1%" R0603 174.052,47.879 r180 bottom value="5.1K, 1%"
R3 "1K,1%" R0603 143.699,62.738 r0 bottom value="5.1K, 1%"
R4 "5.1K,1%" R0603 173.987,50.292 r180 bottom value="5.1K, 1%"
R5 "10K,1%" R0603 4.699,62.357 r180 top value="101, 精度5%"
R6 "5.1K,1%" R0603 184.023,45.212 r180 bottom value="5.1K, 1%"
R7 "5.1K,1%" R0603 184.023,49.911 r180 bottom value="5.1K, 1%"
R8 "5.1K,1%" R0603 183.896,54.864 r180 bottom value="5.1K, 1%"
R9 "1K,1%" R0603 172.02,40.132 r180 bottom value="5.1K, 1%"
R10 "1K,1%" R0603 143.699,43.561 r0 bottom value="5.1K, 1%"
R11 "1K,1%" R0603 143.699,57.531 r0 bottom value="5.1K, 1%"
R12 "1M,1%" R1206 14.91,105.41 r180 bottom value="3.3K, 10%"
R13 "10K,1%" R0603 159.258,77.978 r270 bottom value="3.3K, 10%"
R15 "5.1K,1%" R0603 89.916,77.789 r90 top value="5.1K, 1%"
R16 "5.1K,1%" R0603 161.163,25.4 r180 top value="5.1K, 1%"
R17 "3.3K,1%" R0603 101.919,67.818 r180 top value="3.3K, 10%"
R18 "3.3K,1%" R0603 97.028,52.197 r270 bottom value=10K
R19 "10K,1%" R0603 71.787,62.445 r270 top value=10K
R20 "3.3K,1%" R0603 94.996,52.197 r270 bottom value=10K
R21 "5.1K,1%" R0603 171.069,25.4 r180 top value="5.1K, 1%"
R22 "5.1K,1%" R0603 184.658,20.512 r270 top value="5.1K, 1%"
R23_A1 "1M,1%" R0603 153.735,107.696 r180 top value="3.3K, 10%" (schematic designator R23)
R23_A2 "1M,1%" R0603 162.052,107.696 r180 top value="3.3K, 10%" (schematic designator R23)
R23_A3 "1M,1%" R0603 170.307,107.696 r180 top value="3.3K, 10%" (schematic designator R23)
R23_A4 "1M,1%" R0603 178.689,107.696 r180 top value="3.3K, 10%" (schematic designator R23)
R23_A5 "1M,1%" R0603 145.415,107.696 r180 top value="3.3K, 10%" (schematic designator R23)
R23_A6 "1M,1%" R0603 137.16,107.696 r180 top value="3.3K, 10%" (schematic designator R23)
R23_A7 "1M,1%" R0603 128.905,107.696 r180 top value="3.3K, 10%" (schematic designator R23)
R23_A8 "1M,1%" R0603 120.65,107.696 r180 top value="3.3K, 10%" (schematic designator R23)
R24_A1 "100R,1%" R0603 152.636,100.203 r90 top value="3.3K, 10%" (schematic designator R24)
R24_A2 "100R,1%" R0603 160.953,100.203 r90 top value="3.3K, 10%" (schematic designator R24)
R24_A3 "100R,1%" R0603 169.208,100.203 r90 top value="3.3K, 10%" (schematic designator R24)
R24_A4 "100R,1%" R0603 177.59,100.203 r90 top value="3.3K, 10%" (schematic designator R24)
R24_A5 "100R,1%" R0603 144.316,100.203 r90 top value="3.3K, 10%" (schematic designator R24)
R24_A6 "100R,1%" R0603 136.061,100.203 r90 top value="3.3K, 10%" (schematic designator R24)
R24_A7 "100R,1%" R0603 127.806,100.203 r90 top value="3.3K, 10%" (schematic designator R24)
R24_A8 "100R,1%" R0603 119.551,100.203 r90 top value="3.3K, 10%" (schematic designator R24)
R25_A1 "100R,1%" R0603 150.622,100.203 r90 top value="3.3K, 10%" (schematic designator R25)
R25_A2 "100R,1%" R0603 158.939,100.203 r90 top value="3.3K, 10%" (schematic designator R25)
R25_A3 "100R,1%" R0603 167.194,100.203 r90 top value="3.3K, 10%" (schematic designator R25)
R25_A4 "100R,1%" R0603 175.576,100.203 r90 top value="3.3K, 10%" (schematic designator R25)
R25_A5 "100R,1%" R0603 142.302,100.203 r90 top value="3.3K, 10%" (schematic designator R25)
R25_A6 "100R,1%" R0603 134.047,100.203 r90 top value="3.3K, 10%" (schematic designator R25)
R25_A7 "100R,1%" R0603 125.792,100.203 r90 top value="3.3K, 10%" (schematic designator R25)
R25_A8 "100R,1%" R0603 117.537,100.203 r90 top value="3.3K, 10%" (schematic designator R25)
R26_A1 "1M,1%" R0603 149.671,107.823 r180 top value="3.3K, 10%" (schematic designator R26)
R26_A2 "1M,1%" R0603 157.988,107.823 r180 top value="3.3K, 10%" (schematic designator R26)
R26_A3 "1M,1%" R0603 166.243,107.823 r180 top value="3.3K, 10%" (schematic designator R26)
R26_A4 "1M,1%" R0603 174.625,107.823 r180 top value="3.3K, 10%" (schematic designator R26)
R26_A5 "1M,1%" R0603 141.351,107.823 r180 top value="3.3K, 10%" (schematic designator R26)
R26_A6 "1M,1%" R0603 133.096,107.823 r180 top value="3.3K, 10%" (schematic designator R26)
R26_A7 "1M,1%" R0603 124.841,107.823 r180 top value="3.3K, 10%" (schematic designator R26)
R26_A8 "1M,1%" R0603 116.586,107.823 r180 top value="3.3K, 10%" (schematic designator R26)
R27 "51R,1%" R0603 107.696,81.915 r90 bottom value="3.3K, 10%"
R28 "10K,1%" R0603 60.198,68.707 r0 top value="101, 精度5%"
R29 "3K,1%" R0603 145.217,85.979 r90 top value="3.3K, 10%"
R30 "3K,1%" R0603 150.114,85.979 r90 top value="3.3K, 10%"
R37 "1K,1%" R0603 175.133,72.335 r180 bottom value="3.3K, 10%"
R38 "10R,1%" R0805 175.768,70.104 r0 bottom value="3.3K, 10%"
R39 "15K,1%" R0603 175.641,72.426 r0 top value="3.3K, 10%"
R40 "3.3K,1%" R0603 71.787,66.382 r270 top value="101, 精度5%"
R41 "3K,1%" R0603 58.039,83.82 r270 top value="3.3K, 10%"
R42 "10K,1%" R0603 82.296,77.851 r90 bottom value="5.1K, 1%"
R43 "10K,1%" R0603 69.215,77.851 r90 bottom value="5.1K, 1%"
R44 "10K,1%" R0603 79.756,77.851 r90 bottom value="5.1K, 1%"
R45 "10K,1%" R0603 66.675,77.851 r90 bottom value="5.1K, 1%"
R46 "10K,1%" R0603 77.216,77.851 r90 bottom value="5.1K, 1%"
R47 "10K,1%" R0603 64.135,77.978 r90 bottom value="5.1K, 1%"
R48 "10K,1%" R0603 74.676,77.851 r90 bottom value="5.1K, 1%"
R49 "10K,1%" R0603 61.595,77.978 r90 bottom value="5.1K, 1%"
R50_DIN1 "1K,1%" R0603 110.49,96.266 r180 top value="5.1K, 1%" (schematic designator R50)
R50_DIN2 "1K,1%" R0603 99.822,96.266 r180 top value="5.1K, 1%" (schematic designator R50)
R50_DIN3 "1K,1%" R0603 89.154,96.266 r180 top value="5.1K, 1%" (schematic designator R50)
R50_DIN4 "1K,1%" R0603 78.486,96.266 r180 top value="5.1K, 1%" (schematic designator R50)
R50_DIN5 "1K,1%" R0603 67.818,96.266 r180 top value="5.1K, 1%" (schematic designator R50)
R50_DIN6 "1K,1%" R0603 57.15,96.266 r180 top value="5.1K, 1%" (schematic designator R50)
R50_DIN7 "1K,1%" R0603 46.482,96.266 r180 top value="5.1K, 1%" (schematic designator R50)
R50_DIN8 "1K,1%" R0603 35.814,96.266 r180 top value="5.1K, 1%" (schematic designator R50)
R51_DIN1 "1K,1%" R0603 107.061,108.204 r0 top value="5.1K, 1%" (schematic designator R51)
R51_DIN2 "1K,1%" R0603 96.393,108.204 r0 top value="5.1K, 1%" (schematic designator R51)
R51_DIN3 "1K,1%" R0603 85.725,108.204 r0 top value="5.1K, 1%" (schematic designator R51)
R51_DIN4 "1K,1%" R0603 75.057,108.204 r0 top value="5.1K, 1%" (schematic designator R51)
R51_DIN5 "1K,1%" R0603 64.389,108.204 r0 top value="5.1K, 1%" (schematic designator R51)
R51_DIN6 "1K,1%" R0603 53.721,108.204 r0 top value="5.1K, 1%" (schematic designator R51)
R51_DIN7 "1K,1%" R0603 43.053,108.204 r0 top value="5.1K, 1%" (schematic designator R51)
R51_DIN8 "1K,1%" R0603 32.385,108.204 r0 top value="5.1K, 1%" (schematic designator R51)
R52_DO1 "5.1K,1%" R0603 18.669,29.464 r180 top value="5.1K, 1%" (schematic designator R52)
R52_DO2 "5.1K,1%" R0603 30.226,29.464 r180 top value="5.1K, 1%" (schematic designator R52)
R52_DO3 "5.1K,1%" R0603 41.783,29.464 r180 top value="5.1K, 1%" (schematic designator R52)
R52_DO4 "5.1K,1%" R0603 53.34,29.464 r180 top value="5.1K, 1%" (schematic designator R52)
R52_DO5 "5.1K,1%" R0603 64.897,29.464 r180 top value="5.1K, 1%" (schematic designator R52)
R52_DO6 "5.1K,1%" R0603 76.454,29.464 r180 top value="5.1K, 1%" (schematic designator R52)
R52_DO7 "5.1K,1%" R0603 88.011,29.464 r180 top value="5.1K, 1%" (schematic designator R52)
R52_DO8 "5.1K,1%" R0603 99.568,29.464 r180 top value="5.1K, 1%" (schematic designator R52)
R53 "470R,1%" R0603 112.522,34.544 r90 top value="3.3K, 10%"
R54 "120R,1%" R0603 104.648,34.544 r270 top value="3.3K, 10%"
R55 "470R,1%" R0603 114.535,34.544 r90 top value="3.3K, 10%"
R56 "10K,1%" R0603 123.437,57.277 r270 bottom value="3.3K, 10%"
R57 "22R,1%" R0603 125.451,57.277 r270 bottom value="3.3K, 10%"
R58 "22R,1%" R0603 127.464,57.277 r270 bottom value="3.3K, 10%"
R59 "1M,1%" R1206 108.509,12.05 r270 bottom value="3.3K, 10%"
R60 "10K,1%" R0603 133.726,30.545 r270 top value="3.3K, 10%"
R61 "22R,1%" R0603 131.713,30.545 r270 top value="3.3K, 10%"
R62 "22R,1%" R0603 132.969,17.653 r270 top value="3.3K, 10%"
R63 "22R,1%" R0603 129.699,30.545 r270 top value="3.3K, 10%"
R64 "22R,1%" R0603 137.795,17.653 r270 top value="3.3K, 10%"
R65 "10R,1%" R1210 35.56,81.28 r270 top value="10欧, 精度5%"
R66 "2R,1%" R2512 18.034,96.318 r270 bottom value=2
R67 "100K,1%" R0603 34.021,86.36 r270 top value="100K, 精度5%"
R68 "100K,1%" R0603 15.113,80.956 r180 bottom value="100K, 精度5%"
R69 "1K,1%" R0603 37.084,74.168 r270 bottom value="1K, 精度5%"
R70 "1K,1%" R0603 30.353,75.184 r180 top value="1K, 精度5%"
R71 "100K,1%" R0603 36.703,63.881 r90 bottom value="100K, 精度0.5%"
R72 "100K,1%" R0603 32.639,63.5 r90 bottom value=100K
R73 "100K,1%" R0603 25.781,67.564 r270 top value=100K
R74 "39K,1%" R0603 38.989,63.881 r270 bottom value="39K, 精度0.5%"
R75 "10K,1%" R0603 34.671,63.5 r270 bottom value="10K, 精度0.5%"
R76 "5K,1%" R0603 25.781,64.254 r270 top value="19.1K, 精度0.5%"
R77 "3.3K,1%" R0603 49.872,67.818 r270 top value="10K, 精度5%"
R78 "3.3K,1%" R0603 41.783,67.818 r270 top value=10K
R79 "510K,1%" R0603 21.963,68.129 r180 bottom value="684, 精度0.5%"
R80 "500K,1%" R0603 69.252,59.055 r90 bottom value="684, 精度0.5%"
R81 "3.3K,1%" R0603 45.847,67.818 r270 top value=10K
R82 "1K,1%" R0603 73.279,59.055 r90 bottom value="1K, 精度5%"
R83 "9.1K,1%" R0603 22.098,74.778 r0 bottom value="912, 精度1%"
R84 "47K,1%" R0603 25.277,66.167 r180 bottom value="01D, 精度0.5%"
R85 "10K,1%" R0603 71.266,59.055 r90 bottom value="01D, 精度0.5%"
R86 "100R,1%" R0603 25.527,74.676 r0 bottom value="101, 精度5%"
R87 "430K,1%" R0603 22.098,76.811 r180 bottom value="434, 精度1%"
R88 "10K,1%" R0603 4.699,55.753 r180 top value="101, 精度5%"
R89 "10K,1%" R0603 14.478,111.506 r270 top value="101, 精度5%"
R90 "100K,1%" R0603 9.144,59.047 r90 bottom value="100K, 精度5%"
R91 "100R,1%" R0603 13.666,59.123 r90 bottom value="100K, 精度5%"
R92 "100K,1%" R0603 9.144,62.357 r90 bottom value="100K, 精度5%"
RAC1 "0.01R,1%" R2010 23.876,79.883 r90 top value=CR2010FR010E04Z
RSR1 "0.01R,1%" R2010 8.659,75.184 r90 top value=CR2010FR010E04Z
S1 "轻触开关, 3*6*2.5MM" 3*6*2.5MM 67.818,57.531 r0 top
S2 "SDDJE33300" SW-TH_SDDJE33300 18.358,96.182 r90 top
SU1 "YS-MBZ9042C05R42" BUZ-TH_BD9.0-P4.00-D1.0-FD 116.244,65.659 r90 top value=HY-5525
SW1_DIN1 "XKB8585-1-Z-140" SW-TH_6P-L8.6-W8.6-P2.50-LS5.4 107.585,102.616 r270 top (schematic designator SW1)
SW1_DIN2 "XKB8585-1-Z-140" SW-TH_6P-L8.6-W8.6-P2.50-LS5.4 96.917,102.616 r270 top (schematic designator SW1)
SW1_DIN3 "XKB8585-1-Z-140" SW-TH_6P-L8.6-W8.6-P2.50-LS5.4 86.249,102.616 r270 top (schematic designator SW1)
SW1_DIN4 "XKB8585-1-Z-140" SW-TH_6P-L8.6-W8.6-P2.50-LS5.4 75.581,102.616 r270 top (schematic designator SW1)
SW1_DIN5 "XKB8585-1-Z-140" SW-TH_6P-L8.6-W8.6-P2.50-LS5.4 64.913,102.616 r270 top (schematic designator SW1)
SW1_DIN6 "XKB8585-1-Z-140" SW-TH_6P-L8.6-W8.6-P2.50-LS5.4 54.245,102.616 r270 top (schematic designator SW1)
SW1_DIN7 "XKB8585-1-Z-140" SW-TH_6P-L8.6-W8.6-P2.50-LS5.4 43.577,102.616 r270 top (schematic designator SW1)
SW1_DIN8 "XKB8585-1-Z-140" SW-TH_6P-L8.6-W8.6-P2.50-LS5.4 32.782,102.489 r270 top (schematic designator SW1)
SW2 "XKB8585-1-Z-140" SW-TH_6P-L8.6-W8.6-P2.50-LS5.4 112.776,27.018 r0 top
T1 "B82793S0513N201" FILTER-SMD_4P-L9.0-W6.0_B82790 122.682,24.638 r270 top
U1 "USR-LTE-7S4 V2" USR-LTE-7S4 158.496,49.149 r180 top locked
U2 "STM32F103VC" LQFP100_L 87.757,61.595 r0 top
U3 "WH-BLE102-V1.1" WH-BLE102-V1.1 179.197,21.79 r180 top
U4 "DS3231SN#" SOIC-16_L10.3-W7.5-P1.27-LS10.3-BL 93.599,42.418 r270 top
U5 "MB85RC16PNF" 8S1_N 82.55,45.212 r0 top
U6 "TPS08U_Sketch" TPS08U 114.046,82.824 r0 top
U7 "WRA2415S-3WR2" PWRM-TH_WRA2415S-3WR2 146.812,79.502 r0 top
U8 "π162M31" SOIC-16_L9.9-W3.9-P1.27-LS6.0-BL 127,64.008 r270 top
U9 "AD5422BREZ" TSSOP-24_L7.8-W4.4-P0.65-LS6.4-BL-EP 168.148,77.089 r270 top
U10 "KW3-24S12E" PWRM-TH_WRA2415S-3WR2 41.275,81.661 r90 top
U11 "TLP291-4GB" SOP-16_L10.3-W4.4-P1.27-LS7.0-BL 77.851,84.963 r180 top
U12 "TLP291-4GB" SOP-16_L10.3-W4.4-P1.27-LS7.0-BL 64.77,85.217 r180 top
U13 "TPIC6B595-SOP" TPIC6B595 70.634,42.164 r180 top
U14 "RSM3485PHT" COMM-TH_RSM3485PHT 123.698,46.137 r270 top
U15 "MAX3232CSE" NSO16_N 136.271,23.318 r90 top
U16 "BQ24610" QFN-24_L4.0-W4.0-P0.50-TL-EP2.7 31.496,70.231 r270 top
U17 "AMS1117-3.3V" ams1117/SOT223 69.088,71.528 r270 top
U18 "XL2596T-12E1" TO-263-5_L10.6-W9.6-P1.70-LS15.9-TL 35.814,50.834 r90 top
U19 "XL2596T-5.0E1" TO-263-5_L10.6-W9.6-P1.70-LS15.9-TL 50.927,53.755 r90 top

## Footprints (in the part's own frame and the unit in brackets; to place one, negate y for a bottom-side part, rotate by r counter-clockwise, add the part's x,y. Pads: shape width x height; smd on the part's side, far side on the other; paste and mask are expansions set on the pad)
3*6*2.5MM [mm]
  rect 2.45x1 smd: 1(-1.15,-1.95) 2(6.925,-1.95)
  silkscreen extent -2.53,-3.85 8.3,-0.05
8S1_N [mm] "8-Pin Small Outline Integrated Circuit 1.27 mm Pitch, IPC Medium Density"
  oval 2.2x0.6 smd: 1(-2.4,1.905) 2(-2.4,0.635) 3(-2.4,-0.635) 4(-2.4,-1.905) 5(2.4,-1.905) 6(2.4,-0.635) 7(2.4,0.635) 8(2.4,1.905)
  silkscreen extent -2.52,-2.5 0.9,2.88, body extent -1.95,-2.45 1.95,2.45, height 1.73
ams1117/SOT223 [mm]
  rect 2.7x1 smd: 1(0,0) 2(0,-2.3) 3(0,-4.6)
  rect 2.7x3.3 smd: 2(5.9,-2.3)
  silkscreen extent -0.12,-5.65 4.25,1.18, body extent 1.6,-5.7 4.2,1, height 1.3
BAT-SMD_CR1220-2 [mm]
  rect 4.5x4 smd: 1(-7.62,0) 2(7.62,0)
  round 1.5 hole 1.5 unplated: ""(-3.912,0) ""(3.581,0)
  silkscreen extent -7.22,-7.19 6.92,7.25
BUZ-TH_BD9.0-P4.00-D1.0-FD [mm]
  round 1.8 hole 1: 1(-2,0) 2(2,0)
  silkscreen extent -4.5,-4.5 4.5,4.5
C0603 [mm]
  rect 0.8x0.9 smd: 1(-0.7,0) 2(0.7,0)
  silkscreen extent -1.4,-0.7 1.4,0.72
C0805 [mm]
  rect 1x1.55 smd: 1(-1,0) 2(1,0)
  silkscreen extent -1.75,-1.04 1.75,1.04
C1206 [mm]
  rect 1.2x1.9 smd: 1(-1.6,0) 2(1.6,0)
  silkscreen extent -2.5,-1.2 2.5,1.2
CAP-SMD_L3.2-W1.6-R-RD [mm]
  rect 1.4x1.4 smd: 1(1.5,0) 2(-1.5,0)
  silkscreen extent -1.7,-1 1.7,1
CAP-TH_BD5.0-P2.00-D0.8-FD [mm]
  round 1.3 hole 0.8: 1(-1,0) 2(1,0)
  silkscreen extent -2.5,-2.5 2.5,2.5
CAP-TH_BD6.3-P2.50-D1.0-FD [mm]
  round 1.6 hole 1: 1(-1.27,0) 2(1.27,0)
  silkscreen extent -3.15,-3.15 3.17,3.15
CAP-TH_BD8.0-P3.50-D1.0-FD [mm]
  round 1.6 hole 1: 1(-1.75,0) 2(1.75,0)
  silkscreen extent -3.96,-4 4.04,4
CAP-TH_BD10.0-P5.00-D1.0-FD [mm]
  round 1.6 hole 1: 1(-2.54,0) 2(2.54,0)
  silkscreen extent -5,-5 5.08,4.99
COMM-TH_RSM3485PHT [mm]
  round 1.6 hole 1: 1(-7.62,-3.81) 2(-7.62,-1.27) 3(-7.62,1.27) 4(-7.62,3.81) 7(7.62,3.81) 8(7.62,1.27) 9(7.62,-1.27) 10(7.62,-3.81)
  silkscreen extent -10,-7.03 10,9.57
CONN-TH_2P-P3.81_WJ15EDGRC-3.81-2P [mm]
  rect 2.2x2.2 hole 1.5: 1(-1.905,0)
  round 2.2 hole 1.5: 2(1.905,0)
  silkscreen extent -4.19,-7.88 4.19,1.35
CONN-TH_3P-P3.81_WJ15EDGRC-3.81-3P [mm]
  rect 2.2x2.2 hole 1.5: 1(-3.81,0)
  round 2.2 hole 1.5: 2(0,0) 3(3.81,0)
  silkscreen extent -6.1,-7.88 6.1,1.35
CONN-TH_3P-P5.08_KF2EDGRC-5.08-3P [mm]
  round 2.5 hole 1.8: 1(-5.08,0) 2(0,0) 3(5.08,0)
  silkscreen extent -8.88,-10.9 8.88,1.3
CONN-TH_16P-P3.81_WJ15EDGRC-3.81-16P [mm]
  round 2 hole 1.5: 1(-28.575,0) 2(-24.765,0) 3(-20.955,0) 4(-17.145,0) 5(-13.335,0) 6(-9.525,0) 7(-5.715,0) 8(-1.905,0) 9(1.905,0) 10(5.715,0) 11(9.525,0) 12(13.335,0) 13(17.145,0) 14(20.955,0) 15(24.765,0) 16(28.575,0)
  silkscreen extent -31,-8 31,1.3
CONN-TH_16P-P5.08_KF2EDGRC-5.08-16P [mm]
  round 2.5 hole 1.8: 1(-38.1,0) 2(-33.02,0) 3(-27.94,0) 4(-22.86,0) 5(-17.78,0) 6(-12.7,0) 7(-7.62,0) 8(-2.54,0) 9(2.54,0) 10(7.62,0) 11(12.7,0) 12(17.78,0) 13(22.86,0) 14(27.94,0) 15(33.02,0) 16(38.1,0)
  silkscreen extent -41.9,-10.9 41.9,1.3
DIO-DT-SMD_L7.2-W5.0 [mm]
  rect 1.8x5.8 smd: 1(-3.3,0) 3(3.3,0)
  rect 2.4x5.8 smd: 2(0,0)
  silkscreen extent -2.13,-2.51 2.11,2.49
DSUB-TH_2-5747706-0 [mm]
  rect 1.69x1.69 hole 1.09: 1(5.54,1.42)
  round 1.69 hole 1.09: 2(2.77,1.42) 3(0,1.42) 4(-2.77,1.42) 5(-5.54,1.42) 6(4.155,-1.42) 7(1.385,-1.42) 8(-1.385,-1.42) 9(-4.155,-1.42)
  round 4.826 hole 3.302: 10(12.495,0) 11(-12.495,0)
  silkscreen extent -15.4,-6.7 15.4,6.51
FILTER-SMD_4P-L9.0-W6.0_B82790 [mm]
  rect 2.85x1.2 smd: 1(-3.7,1.25) 2(3.7,1.25) 3(3.7,-1.25) 4(-3.7,-1.25)
  silkscreen extent -3.53,-3 3.56,3
HDR1X2 [mm] "Connector; Header; 2 Position"
  rect 1.5x1.5 hole 0.9: 1(0,0)
  round 1.5 hole 0.9: 2(2.54,0)
  silkscreen extent -1.27,-1.27 3.81,1.27
HDR1X4 [mm] "Connector; Header; 4 Position"
  rect 1.5x1.5 hole 0.9: 1(0,0)
  round 1.5 hole 0.9: 2(2.54,0) 3(5.08,0) 4(7.62,0)
  silkscreen extent -1.27,-1.27 8.89,1.27
IND-SMD_L4.0-W4.0_SLS3DXX [mm]
  rect 1.2x4 smd: 1(-1.8,0) 2(1.8,0)
  silkscreen extent -2,-2.3 2,2.3
IND-SMD_L7.3-W6.8 [mm]
  rect 2.35x3.5 smd: 1(-3,0) 2(3,0)
  silkscreen extent -3.5,-3.3 3.5,3.3
IND-SMD_L13.7-W12.6_MS1360 [mm]
  rect 3.5x5 smd: 1(-5.7,0) 2(5.7,0)
  silkscreen extent -6.9,-6.3 6.9,6.3
L0603 [mm]
  rect 1x1.1 smd: 1(-0.9,0) 2(0.9,0)
  silkscreen extent -1.68,-0.85 1.68,0.85
L0805 [mm]
  rect 1x1.55 smd: 1(-1,0) 2(1,0)
  silkscreen extent -1.78,-1.08 1.78,1.08
LED0603-RD [mm]
  rect 0.9x1 smd: 1(-0.85,0) 2(0.85,0)
  silkscreen extent -1.75,-0.75 1.55,0.75
LQFP100_L [mm] "Thin QFP, 100-Leads, Body 14x14mm, Pitch 0.5mm, IPC High Density"
  oval 1.55x0.25 smd: 1(-7.525,6) 2(-7.525,5.5) 3(-7.525,5) 4(-7.525,4.5) 5(-7.525,4) 6(-7.525,3.5) 7(-7.525,3) 8(-7.525,2.5) 9(-7.525,2) 10(-7.525,1.5) 11(-7.525,1) 12(-7.525,0.5) 13(-7.525,0) 14(-7.525,-0.5) 15(-7.525,-1) 16(-7.525,-1.5) 17(-7.525,-2) 18(-7.525,-2.5) 19(-7.525,-3) 20(-7.525,-3.5) 21(-7.525,-4) 22(-7.525,-4.5) 23(-7.525,-5) 24(-7.525,-5.5) 25(-7.525,-6) 51(7.525,-6) 52(7.525,-5.5) 53(7.525,-5) 54(7.525,-4.5) 55(7.525,-4) 56(7.525,-3.5) 57(7.525,-3) 58(7.525,-2.5) 59(7.525,-2) 60(7.525,-1.5) 61(7.525,-1) 62(7.525,-0.5) 63(7.525,0) 64(7.525,0.5) 65(7.525,1) 66(7.525,1.5) 67(7.525,2) 68(7.525,2.5) 69(7.525,3) 70(7.525,3.5) 71(7.525,4) 72(7.525,4.5) 73(7.525,5) 74(7.525,5.5) 75(7.525,6)
  oval 0.25x1.55 smd: 26(-6,-7.525) 27(-5.5,-7.525) 28(-5,-7.525) 29(-4.5,-7.525) 30(-4,-7.525) 31(-3.5,-7.525) 32(-3,-7.525) 33(-2.5,-7.525) 34(-2,-7.525) 35(-1.5,-7.525) 36(-1,-7.525) 37(-0.5,-7.525) 38(0,-7.525) 39(0.5,-7.525) 40(1,-7.525) 41(1.5,-7.525) 42(2,-7.525) 43(2.5,-7.525) 44(3,-7.525) 45(3.5,-7.525) 46(4,-7.525) 47(4.5,-7.525) 48(5,-7.525) 49(5.5,-7.525) 50(6,-7.525) 76(6,7.525) 77(5.5,7.525) 78(5,7.525) 79(4.5,7.525) 80(4,7.525) 81(3.5,7.525) 82(3,7.525) 83(2.5,7.525) 84(2,7.525) 85(1.5,7.525) 86(1,7.525) 87(0.5,7.525) 88(0,7.525) 89(-0.5,7.525) 90(-1,7.525) 91(-1.5,7.525) 92(-2,7.525) 93(-2.5,7.525) 94(-3,7.525) 95(-3.5,7.525) 96(-4,7.525) 97(-4.5,7.525) 98(-5,7.525) 99(-5.5,7.525) 100(-6,7.525)
  silkscreen extent -7.65,-6.35 6.35,6.8, body extent -7,-7 7,7, height 1.6
NSO16_N [mm] "SOIC, 16-Leads, Body 9.9x3.9mm, Pitch 1.27mm, IPC Medium Density"
  oval 2.2x0.6 smd: 1(-2.4,4.445) 2(-2.4,3.175) 3(-2.4,1.905) 4(-2.4,0.635) 5(-2.4,-0.635) 6(-2.4,-1.905) 7(-2.4,-3.175) 8(-2.4,-4.445) 9(2.4,-4.445) 10(2.4,-3.175) 11(2.4,-1.905) 12(2.4,-0.635) 13(2.4,0.635) 14(2.4,1.905) 15(2.4,3.175) 16(2.4,4.445)
  silkscreen extent -2.52,-5 0.9,5.42, body extent -2,-5 2,5, height 1.75
PWRM-TH_WRA2415S-3WR2 [mm]
  round 1.9 hole 1.2: 1(-8.89,0) 2(-6.35,0) 3(-3.81,0) 5(1.27,0) 6(3.81,0) 7(6.35,0) 8(8.89,0)
  silkscreen extent -11,-7.04 11,2.46
QFN-24_L4.0-W4.0-P0.50-TL-EP2.7 [mm]
  oval 0.796x0.28 smd: 1(-2,1.25) 2(-2,0.75) 3(-2,0.25) 4(-2,-0.25) 5(-2,-0.75) 6(-2,-1.25) 13(2,-1.25) 14(2,-0.75) 15(2,-0.25) 16(2,0.25) 17(2,0.75) 18(2,1.242)
  oval 0.28x0.796 smd: 7(-1.25,-2) 8(-0.75,-2) 9(-0.25,-2) 10(0.25,-2) 11(0.75,-2) 12(1.25,-2) 19(1.25,2) 20(0.75,2) 21(0.25,2) 22(-0.25,2) 23(-0.75,2) 24(-1.25,2)
  rect 2.7x2.7 smd: 25(0,-0.013)
  silkscreen extent -3.05,-2.16 2.15,2.14
R0603 [mm]
  rect 0.8x0.9 smd: 1(-0.7,0) 2(0.7,0)
  silkscreen extent -1.4,-0.75 1.4,0.76
R0805 [mm]
  rect 1.3x1.4 smd: 1(-1.2,0) 2(1.2,0)
  silkscreen extent -2.15,-1 2.15,1, body extent -2.1,-1 2.1,1, height 0.8
R1206 [mm]
  rect 1.2x1.9 smd: 1(-1.6,0) 2(1.6,0)
  silkscreen extent -2.5,-1.2 2.5,1.2
R1210 [mm]
  rect 1.2x2.7 smd: 1(-1.6,0) 2(1.6,0)
  silkscreen extent -2.5,-1.6 2.5,1.6
R2010 [mm]
  rect 1.4x2.7 smd: 1(-2.5,0) 2(2.5,0)
  silkscreen extent -3.5,-1.6 3.5,1.6
R2512 [mm]
  rect 1.6x3.3 smd: 1(-3.25,0) 2(3.25,0)
  silkscreen extent -4.3,-1.9 4.3,1.9
RELAY-TH_JZC-32F-XXXHXX [mm]
  round 2.5 hole 1.4: 1(-7.62,-3.8) 2(-7.62,3.8) 3(7.62,3.8) 4(5.08,-3.8)
  silkscreen extent -9.03,-5.08 9.37,5.04
SMA_L4.4-W2.8-LS5.4-RD [mm]
  rect 1.8x2 smd: 1(2.1,0) 2(-2.1,0)
  silkscreen extent -2.3,-1.4 2.3,1.4
SMB_L4.6-W3.6-LS5.3-BI [mm]
  rect 2.3x2.7 smd: 1(-2.2,0) 2(2.2,0)
  silkscreen extent -2.45,-2 2.45,2
SMB_L4.6-W3.6-LS5.3-RD [mm]
  rect 2.29x2.72 smd: 1(2.025,0) 2(-2.025,0)
  silkscreen extent -2.35,-2 2.35,2
SO8_L [mm] "SOIC, 8-Leads, Body 4.9x3.9mm, Pitch 1.27mm, IPC High Density"
  oval 1.9x0.6 smd: 1(-2.35,1.905) 2(-2.35,0.635) 3(-2.35,-0.635) 4(-2.35,-1.905) 5(2.35,-1.905) 6(2.35,-0.635) 7(2.35,0.635) 8(2.35,1.905)
  silkscreen extent -2.48,-2.5 1,2.88, body extent -2,-2.5 2,2.5, height 1.75
SOD-123 [mm] "SOD-123; 2 Leads; Body 2.7 x 1.6 mm, (LxW)"
  rect 1.6x0.8 smd: 1(-1.7,0) 2(1.7,0)
  silkscreen extent -1.95,-1.4 1.95,1.4
SOD-123_L2.8-W1.8-LS3.7-FD [mm]
  rect 1.2x1.4 smd: 1(-1.7,0) 2(1.7,0)
  silkscreen extent -1.5,-1 1.5,1
SOD-123_L2.8-W1.8-LS3.7-RD [mm]
  rect 1.2x1.4 smd: 1(1.7,0) 2(-1.7,0)
  silkscreen extent -1.5,-1 1.5,1
SOD-523 [mm]
  rect 0.6x0.6 smd: 1(-0.7,0) 2(0.7,0)
  silkscreen extent -0.71,-0.67 0.63,0.67
SOIC-16_L9.9-W3.9-P1.27-LS6.0-BL [mm]
  oval 0.6x1.798 smd: 1(-4.445,-2.972) 2(-3.175,-2.972) 3(-1.905,-2.972) 4(-0.635,-2.972) 5(0.635,-2.972) 6(1.905,-2.972) 7(3.175,-2.972) 8(4.445,-2.972) 9(4.445,2.972) 10(3.175,2.972) 11(1.905,2.972) 12(0.635,2.972) 13(-0.635,2.972) 14(-1.905,2.972) 15(-3.175,2.972) 16(-4.445,2.972)
  silkscreen extent -4.98,-1.85 4.98,1.83
SOIC-16_L10.3-W7.5-P1.27-LS10.3-BL [mm]
  oval 0.6x2.298 smd: 1(-4.445,-5.194) 2(-3.175,-5.194) 3(-1.905,-5.194) 4(-0.635,-5.194) 5(0.635,-5.194) 6(1.905,-5.194) 7(3.175,-5.194) 8(4.445,-5.194) 9(4.445,5.194) 10(3.175,5.194) 11(1.905,5.194) 12(0.635,5.194) 13(-0.635,5.194) 14(-1.905,5.194) 15(-3.175,5.194) 16(-4.445,5.194)
  silkscreen extent -5.49,-5.37 5.1,3.8
SOP-16_L10.3-W4.4-P1.27-LS7.0-BL [mm]
  oval 0.6x2.198 smd: 1(-4.445,-2.75) 2(-3.175,-2.75) 3(-1.905,-2.75) 4(-0.635,-2.75) 5(0.635,-2.75) 6(1.905,-2.75) 7(3.175,-2.75) 8(4.445,-2.75) 9(4.445,2.75) 10(3.175,2.75) 11(1.905,2.75) 12(0.635,2.75) 13(-0.635,2.75) 14(-1.905,2.75) 15(-3.175,2.75) 16(-4.445,2.75)
  silkscreen extent -5.66,-2.79 5.15,2.2
SOT-23 [mm] "SOT-23; 3 Leads; Body 3.1 x 2.5 mm, inc. leads (LxW max)"
  rect 0.9x0.95 smd: 1(-0.95,-1.175) 2(0.95,-1.175) 3(0,1.175)
  silkscreen extent -2.07,-1.3 1.3,1.18
SOT-23_NPN [mm] "SOT23, 3-Leads, Body 2.9x1.3mm, Pitch 0.95mm, Lead Span 2.4mm, IPC Low Density"
  rect 1.45x0.6 smd: B(-1.175,0.95) C(1.175,0) E(-1.175,-0.95)
  silkscreen extent -1.3,-1.5 0.7,1.92, body extent -0.7,-1.5 0.7,1.5, height 1.14
SW-TH_6P-L8.6-W8.6-P2.50-LS5.4 [mm]
  rect 1.6x1.6 hole 1: 1(-2.5,-2.7)
  round 1.6 hole 1: 2(0,-2.7) 3(2.5,-2.7) 4(-2.5,2.7) 5(0,2.7) 6(2.5,2.7)
  silkscreen extent -4.3,-5.36 4.3,4.3
SW-TH_SDDJE33300 [mm]
  round 2.5 hole 1.7: 1(5,-4.375) 2(-5.25,-4.375) 3(5,4.375) 4(-5.25,4.375)
  silkscreen extent -10.5,-7.5 10.5,7.5
TO-263-5_L10.6-W9.6-P1.70-LS15.9-TL [mm]
  rect 3.5x1.069 smd: 1(-5.3,3.404) 2(-5.3,1.702) 3(-5.3,0) 4(-5.3,-1.702) 5(-5.3,-3.404)
  rect 8.89x10.66 smd: 6(5.3,0)
  silkscreen extent -4.07,-5.08 0.41,5.08
TPIC6B595 [mm]
  oval 2.3x0.6 smd: 1(4.55,-5.715) 2(4.55,-4.445) 3(4.55,-3.175) 4(4.55,-1.905) 5(4.55,-0.635) 6(4.55,0.635) 7(4.55,1.905) 8(4.55,3.175) 9(4.55,4.445) 10(4.55,5.715) 11(-4.55,5.715) 12(-4.55,4.445) 13(-4.55,3.175) 14(-4.55,1.905) 15(-4.55,0.635) 16(-4.55,-0.635) 17(-4.55,-1.905) 18(-4.55,-3.175) 19(-4.55,-4.445) 20(-4.55,-5.715)
  silkscreen extent -3,-7.11 4.83,6.5, body extent -3.8,-6.5 3.8,6.5, height 2.65